# Altium PCB PCB_DriveSwitch_rev1_05062018.PcbDoc
Units mm, origin at the board's own origin, x right, y up, seen from the top; angles counter-clockwise.
Board outline 72.5 x 80 mm, 2 copper layers (Top Layer, Bottom Layer), stack 1.671 mm thick; 35 components, 28 nets, 103 pads, 12 vias.
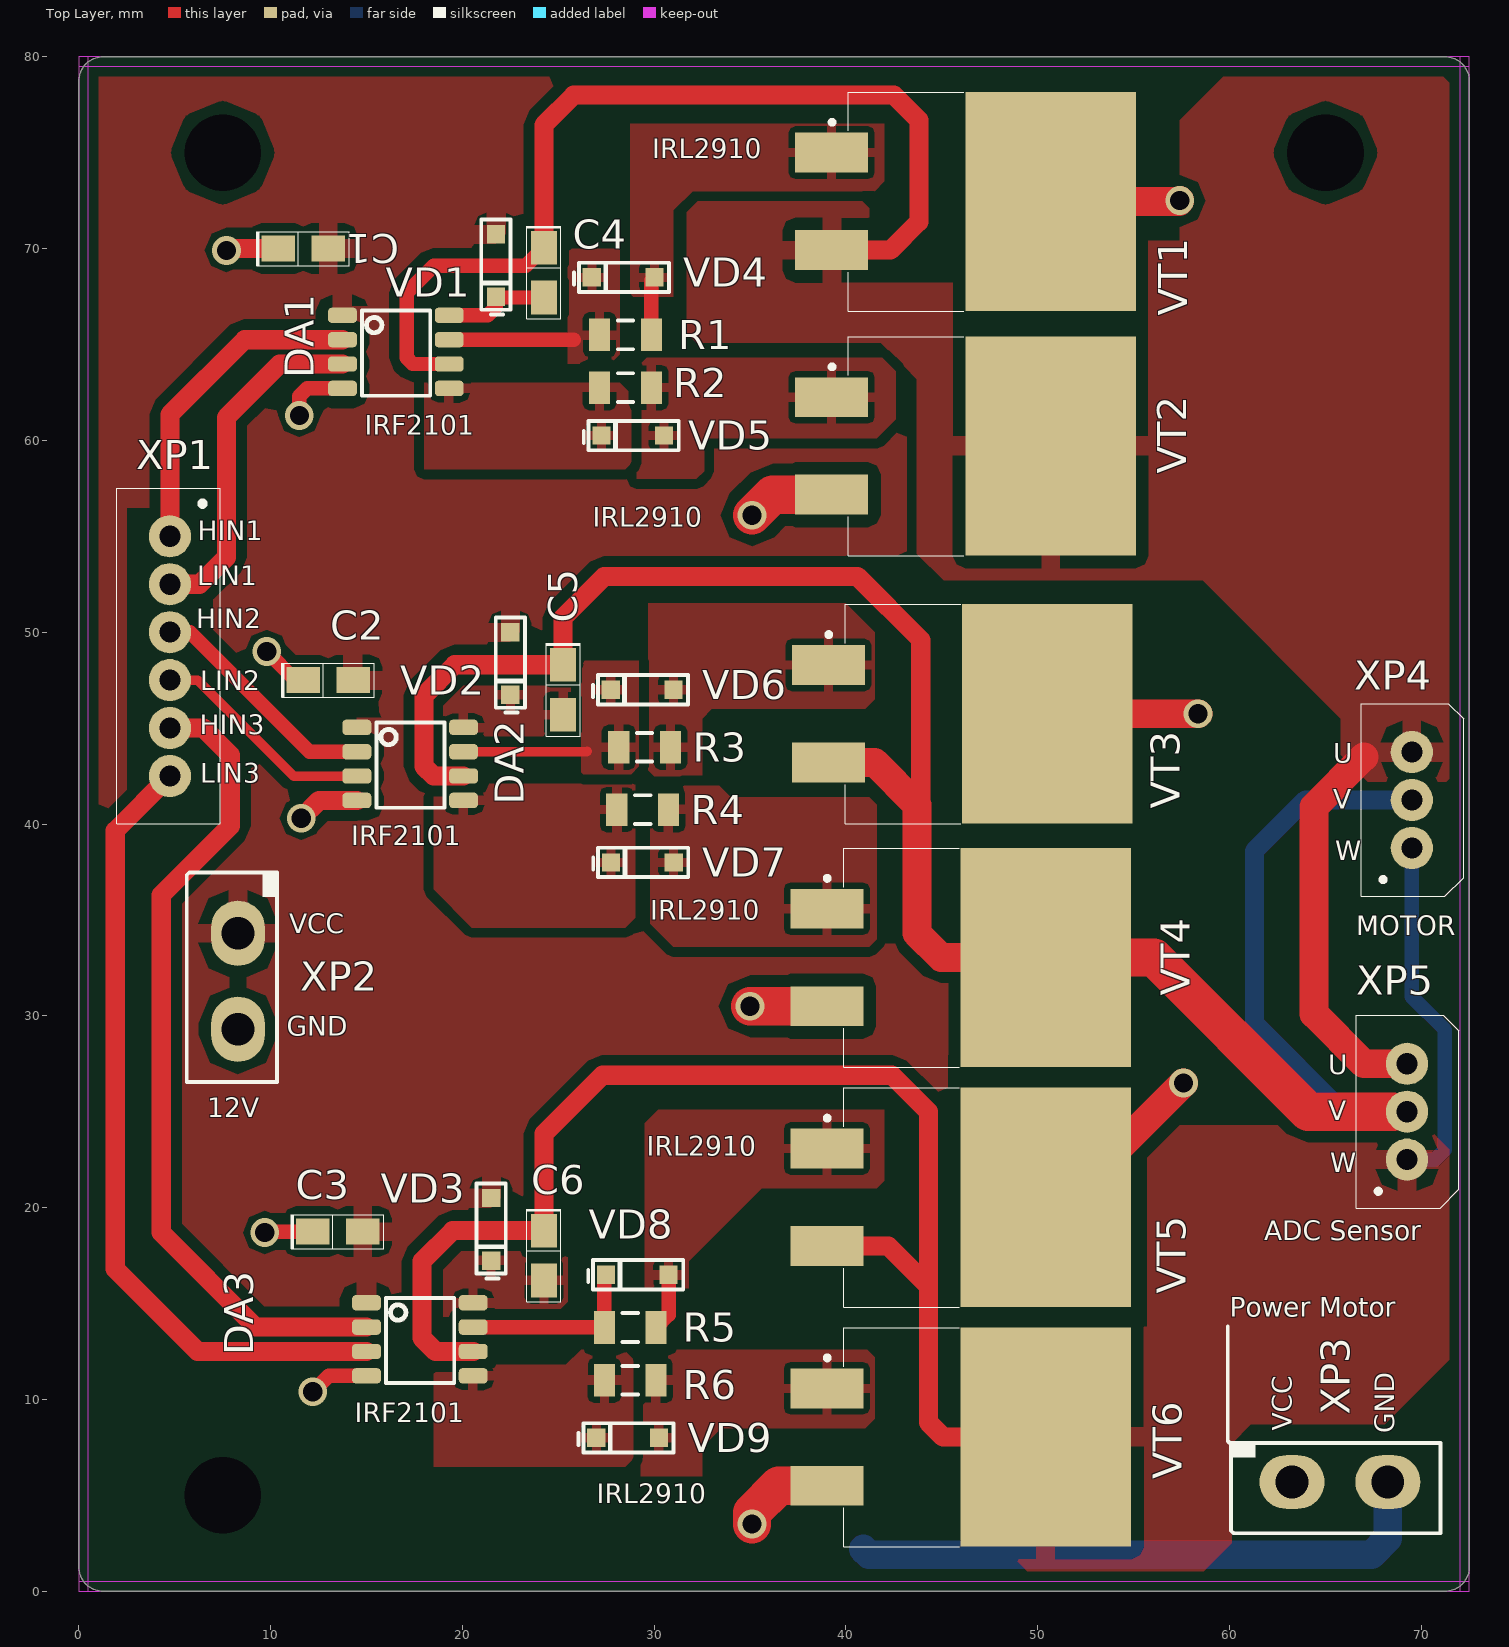
[diagram p0: Top Layer view]
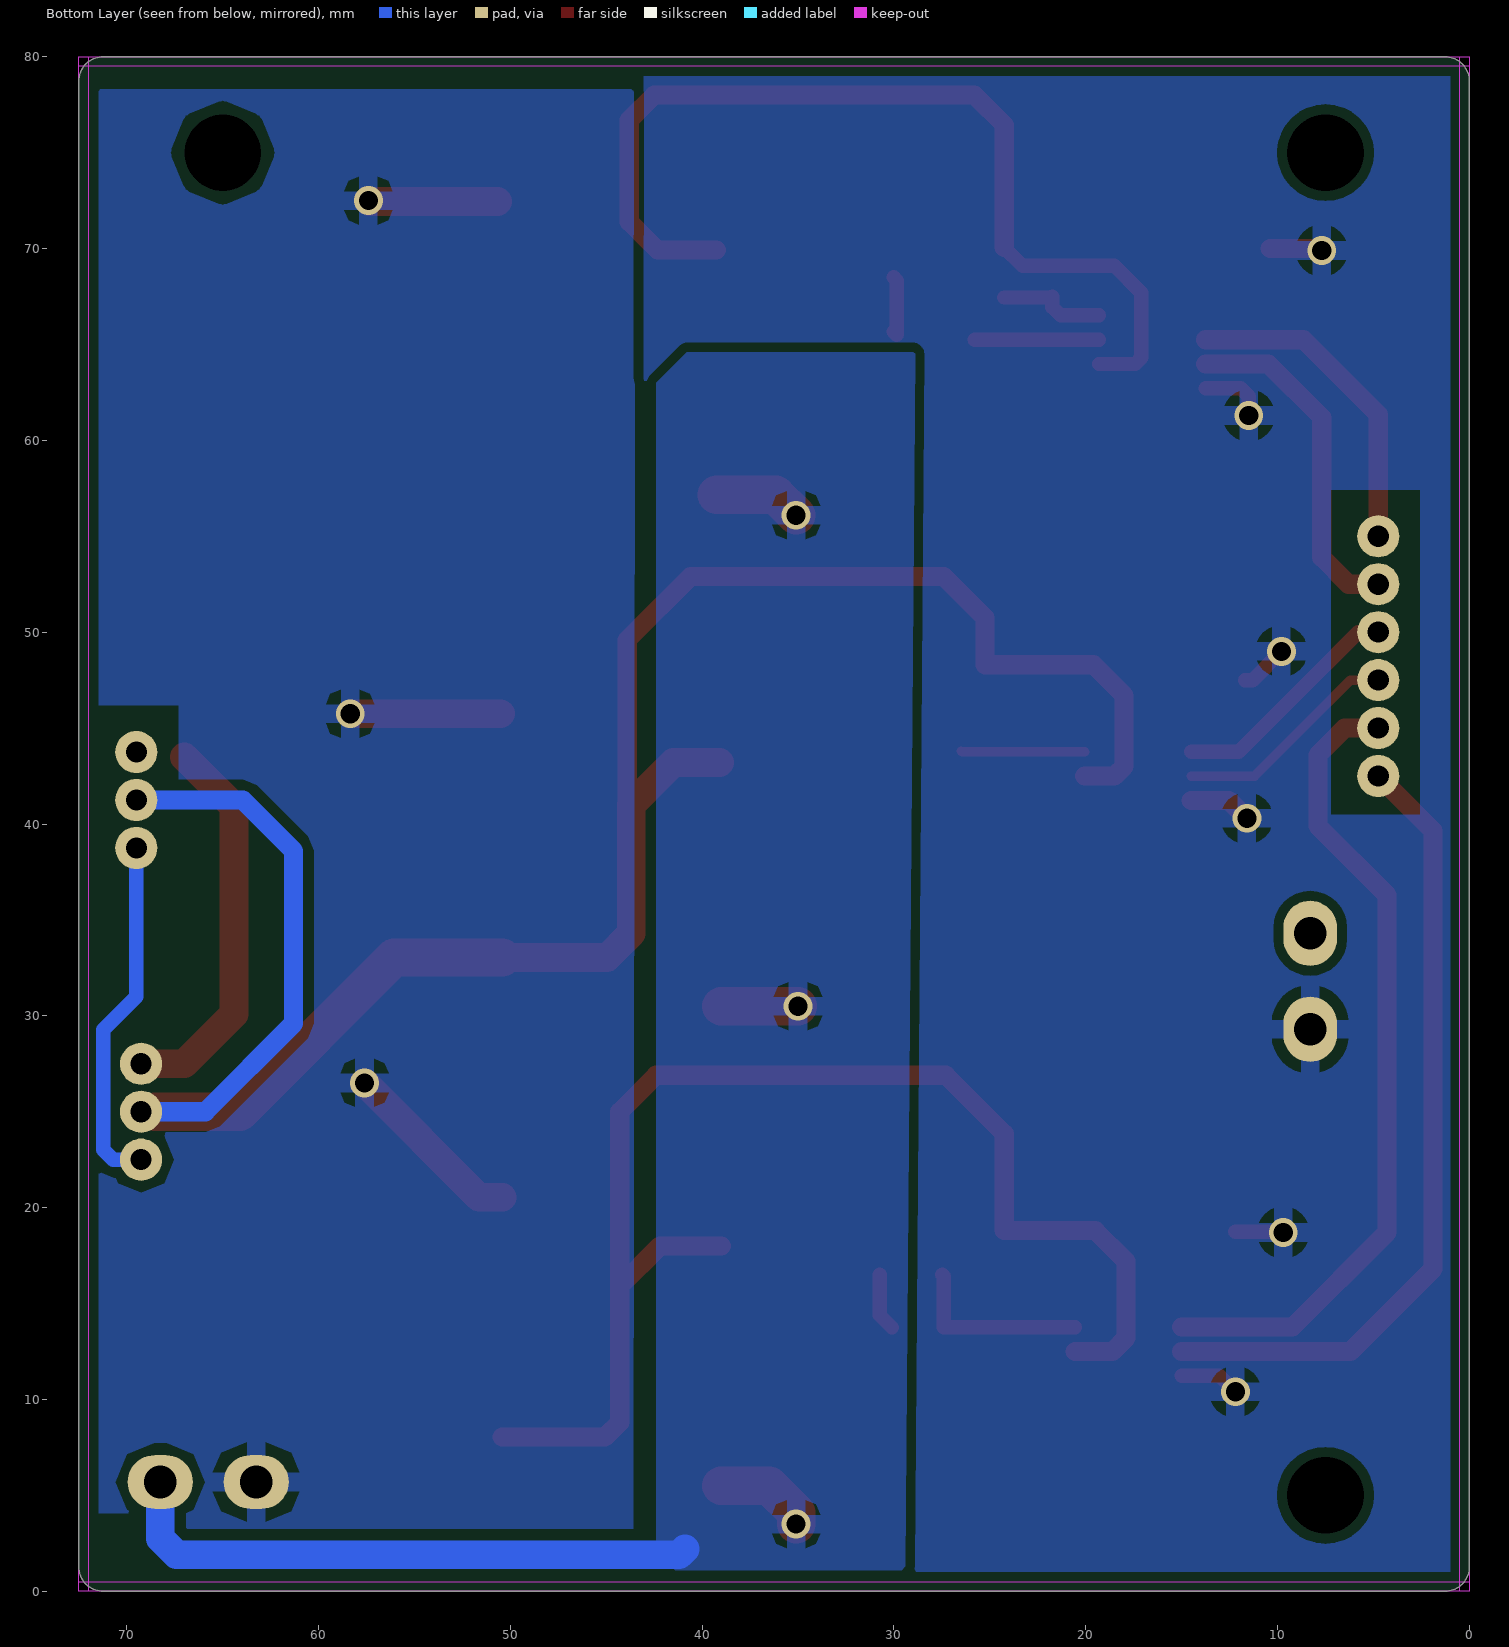
[diagram p1: Bottom Layer view, seen from below]
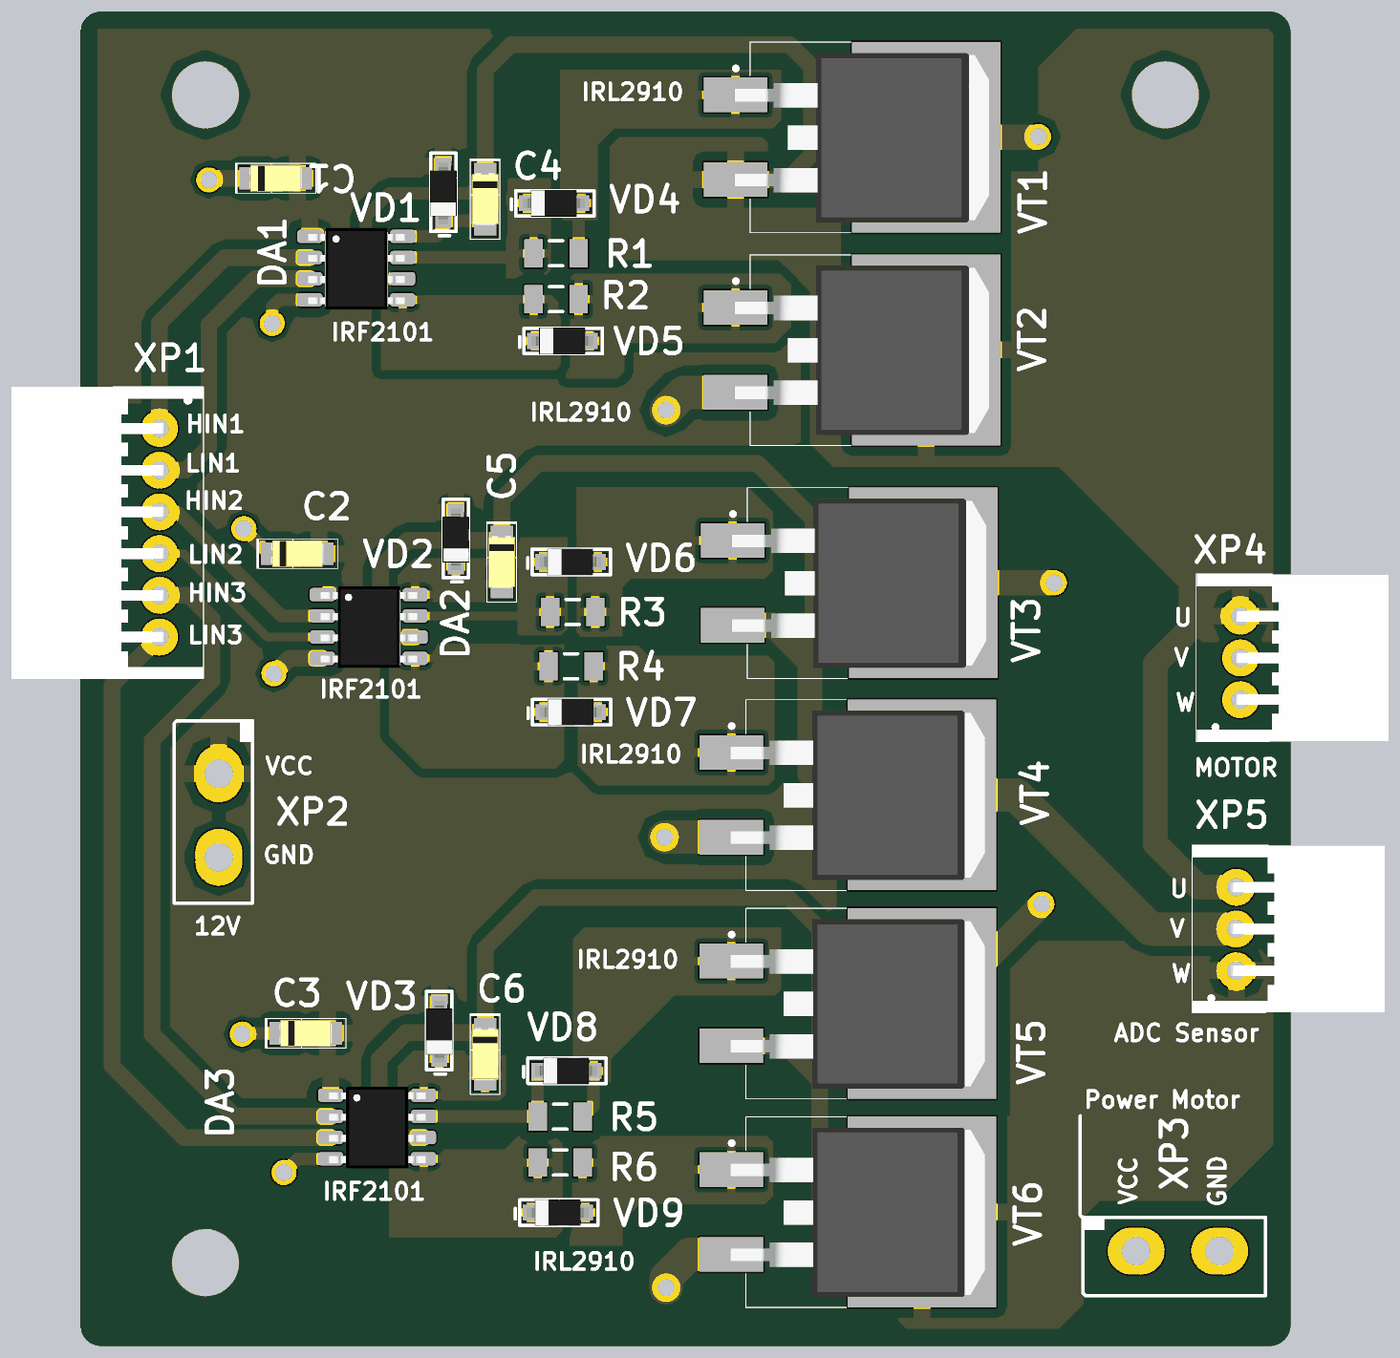
[diagram p2: 3D render of the assembled board from above, using the file's embedded part models]

## Layer stack, top to bottom
Top Solder: solder mask 0.0102, Solder Resist, Dk 3.5
Top Layer: signal copper 0.0356
Dielectric 1: dielectric 1.6, FR-4, Dk 4.8
Bottom Layer: signal copper 0.0356
Bottom Solder: solder mask 0.0102, Solder Resist, Dk 3.5

## Board outline
1.27,0 cw(c1.27,1.27) 0,1.27 0,78.73 cw(c1.27,78.73) 1.27,80 71.23,80 cw(c71.23,78.73) 72.5,78.73 72.5,1.27 cw(c71.23,1.27) 71.23,0

## Design rules (kind name [scope] priority, off if disabled: settings)
Clearance [All] p1: gap=0.5 ignorepadtopadclearanceinfootprint=FALSE except(0.125: Arc-Arc Arc-Track Arc-Via Track-Track Track-Via SMDPad-SMDPad SMDPad-Via THPad-Via Via-Via; 0.254: Arc-Fill Track-Fill SMDPad-Fill THPad-Fill Via-Fill Fill-Fill; 0.3: Arc-SMDPad Track-SMDPad THPad-THPad Via-Poly; 0.6: SMDPad-Poly)
PlaneClearance PlaneClearance_Sig [InPadClass('Signal')] p1: clearance=0.5
PlaneClearance PlaneClearance_pow [InPadClass('Power')] p2: clearance=1
PlaneConnect PlaneConnect_Signal [InPadClass('Signal')] p1: planeconnectstyle=Relief reliefexpansion=0.5 reliefentries=4 reliefconductorwidth=0.5 reliefairgap=0.3
PlaneConnect PlaneConnect_Pow [InPadClass('Power')] p2: planeconnectstyle=Relief reliefexpansion=0.5 reliefentries=4 reliefconductorwidth=0.75 reliefairgap=0.3
PolygonConnect PolygonConnect_Pow [(InNetClass('OUTPUTSignalPhase') OR InNetClass('PowerControl') OR InNetClass('PowerOut'))] p1: connectstyle=Relief reliefconductorwidth=1 reliefentries=4 polygonreliefangle="90 Angle" airgapwidth=0.6
PolygonConnect PolygonConnect_Sign [(InNetClass('C_controlGate') OR InNetClass('c_strapp')OR InNetClass('SignalInput'))] p2: connectstyle=Relief reliefconductorwidth=0.5 reliefentries=4 polygonreliefangle="90 Angle" airgapwidth=0.3
RoutingVias RoutingVias_1 [(InNetClass('OUTPUTSignalPhase') OR InNetClass('PowerControl') OR InNetClass('PowerOut'))] p1: holewidth=1 width=1.5 viastyle="Through Hole" minholewidth=1 minwidth=1.5 maxholewidth=1 maxwidth=1.5
RoutingVias RoutingVias1 [(InNetClass('C_controlGate') OR InNetClass('c_strapp')OR InNetClass('SignalInput'))] p2: holewidth=0.6 width=1.2 viastyle="Through Hole" minholewidth=0.6 minwidth=1.2 maxholewidth=0.6 maxwidth=1.2
SolderMaskExpansion [All] p1: expansion=0.102
Width Input_S [InNetClass('SignalInput')] p1: maxlimit=1 minlimit=0.4 preferedwidth=0.5
Width POWEROUT [InNetClass('PowerOut')] p2: maxlimit=3 minlimit=0.75 preferedwidth=1
Width Power_circuit [InNetClass('PowerControl')] p3: maxlimit=3 minlimit=0.75 preferedwidth=2
Width OUT [InNetClass('OUTPUTSignalPhase')] p4: maxlimit=3 minlimit=0.75 preferedwidth=2
Width stpp [InNetClass('c_strapp')] p5: maxlimit=1 minlimit=0.5 preferedwidth=0.7
Width GAIN_circ [InNetClass('C_controlGate')] p6: maxlimit=1 minlimit=0.5 preferedwidth=0.7
28 further rules are at their usual default settings.

## Classes and differential pairs
pad class Signal: DA1-2 DA1-3 DA2-2 DA2-3 DA3-2 DA3-3 R1-1 R1-2 R2-1 R2-2 R3-1 R3-2 R4-1 R4-2 R5-1 R5-2 R6-1 R6-2 VD4-1 VD4-2 VD5-1 VD5-2 VD6-1 VD6-2 VD7-1 VD7-2 VD8-1 VD8-2 VD9-1 VD9-2 VT1-1 VT2-1 VT3-1 VT4-1 VT5-1 VT6-1
pad class Power: C1-1 C1-2 C2-1 C2-2 C3-1 C3-2 C4-1 C4-2 C5-1 C5-2 C6-1 C6-2 DA1-1 DA1-4 DA1-5 DA1-6 DA1-7 DA1-8 DA2-1 DA2-4 DA2-5 DA2-6 DA2-7 DA2-8 DA3-1 DA3-4 DA3-5 DA3-6 DA3-7 DA3-8 VD1-1 VD1-2 VD2-1 VD2-2 VD3-1 VD3-2 VT1-2 VT1-3 VT2-2 VT2-3 VT3-2 VT3-3 VT4-2 VT4-3 VT5-2 VT5-3 VT6-2 VT6-3 XP2-1 XP2-2 XP3-1 XP3-2 XP4-1 XP4-2 XP4-3 XP5-1 XP5-2 XP5-3
net class C_controlGate: NetDA1_5 NetDA1_7 NetDA2_5 NetDA2_7 NetDA3_5 NetDA3_7 NetR1_2 NetR2_2 NetR3_2 NetR4_2 NetR5_2 NetR6_2
net class c_strapp: NetC4_1 NetC5_1 NetC6_1
net class OUTPUTSignalPhase: U V W
net class PowerControl: +12V GND
net class PowerOut: +VDD_M GND_M
net class SignalInput: HIN1 HIN2 HIN3 LIN1 LIN2 LIN3

## Components (designator, comment, footprint, x,y, rotation, side; value= is the part's Value field where it differs from the comment)
C1 "10uF" CAPTtantaltypeA 11.7,70 r180 top
C2 "10uF" CAPTtantaltypeA 13,47.5 r180 top
C3 "10uF" CAPTtantaltypeA 13.5,18.75 r180 top
C4 "2.2uF" CAPTtantaltypeA 24.25,68.75 r90 top
C5 "2.2uF" CAPTtantaltypeA 25.25,47 r90 top
C6 "2.2uF" CAPTtantaltypeA 24.25,17.5 r90 top
DA1 "IR2101" SO-8 14.512,66.52 r0 top
DA2 "IR2101" SO-8 15.262,45.04 r0 top
DA3 "IR2101" SO-8 15.762,15.04 r0 top
R1 "10 Ом" 1206 28.5,65.5 r0 top
R2 "10 Ом" 1206 28.5,62.75 r0 top
R3 "10 Ом" 1206 29.5,44 r0 top
R4 "10 Ом" 1206 29.4,40.75 r0 top
R5 "10 Ом" 1206 28.75,13.75 r0 top
R6 "10 Ом" 1206 28.75,11 r0 top
VD1 "SS0540" SOD-123 21.75,70.75 r270 top
VD2 "SS0540" SOD-123 22.5,50 r270 top
VD3 "SS0540" SOD-123 21.5,20.5 r270 top
VD4 "SS0540" SOD-123 30.016,68.5 r180 top
VD5 "SS0540" SOD-123 30.516,60.25 r180 top
VD6 "SS0540" SOD-123 31,47 r180 top
VD7 "SS0540" SOD-123 31.016,38 r180 top
VD8 "SS0540" SOD-123 30.75,16.5 r180 top
VD9 "SS0540" SOD-123 30.25,8 r180 top
VT1 "IRL2910SPBF" D2PACK 50.67,72.46 r270 top value="55А, 100В"
VT2 "IRL2910SPBF" D2PACK 50.67,59.71 r270 top value="55А, 100В"
VT3 "IRL2910SPBF" D2PACK 50.5,45.75 r270 top value="55А, 100В"
VT4 "IRL2910SPBF" D2PACK 50.42,33.04 r270 top value="55А, 100В"
VT5 "IRL2910SPBF" D2PACK 50.42,20.54 r270 top value="55А, 100В"
VT6 "IRL2910SPBF" D2PACK 50.42,8.04 r270 top value="55А, 100В"
XP1 "CWF-6R" CWF-6R 4.75,55 r270 top
XP2 "XY2500R-A-2P" KLS2-EDR-500-2P 8.3,34.3 r270 top
XP3 "XY2500R-A-2P" KLS2-EDR-500-2P 63.25,5.694 r0 top
XP4 "CWF-3R" CWF-3R 69.5,38.75 r90 top
XP5 "CWF-3R" CWF-3R 69.25,22.5 r90 top

## Footprints (in the part's own frame and the unit in brackets; to place one, negate y for a bottom-side part, rotate by r counter-clockwise, add the part's x,y. Pads: shape width x height; smd on the part's side, far side on the other; paste and mask are expansions set on the pad)
1206 [mm]
  rect 1.1x1.7 smd: 1(-1.35,0) 2(1.35,0)
  silkscreen extent -0.4,-0.75 0.4,0.75, body extent -1.55,-0.83 1.55,0.83, height 0.67
CAPTtantaltypeA [mm] "Molded Capacitor, 2-Leads, Body 3,20x1,60mm, IPC Medium Density"
  rect 1.75x1.35 smd: 1(-1.3,0) 2(1.3,0)
  silkscreen extent -2.41,-0.89 2.41,0.89, body extent -1.6,-0.8 1.6,0.8, height 1.61
CWF-3R [mm]
  round 2.2 hole 1.1: 1(5,0) 2(2.5,0) 3(0,0)
  silkscreen extent -2.52,-2.7 7.52,2.65, body extent -2.5,-8.88 7.5,2.62, height 5.75
CWF-6R [mm]
  round 2.2 hole 1.1: 1(0,0) 2(2.5,0) 3(5,0) 4(7.5,0) 5(10,0) 6(12.5,0)
  silkscreen extent -2.5,-2.78 14.97,2.63, body extent -2.5,-8.88 15,2.62, height 5.75
D2PACK [mm]
  rect 2.08x3.81 smd: 1(-2.54,-11.42) 3(2.54,-11.42)
  rect 11.43x8.89 smd: 2(0,0)
  silkscreen extent -5.7,-11.5 5.73,-4.52, body extent -5.05,-11.49 5.11,3.77, height 4.88
KLS2-EDR-500-2P [mm]
  oval 3.4x2.8 hole 1.7: 1(0,0) 2(5,0)
  silkscreen extent -3.18,-2.67 7.75,2.03, body extent -3,-20.69 7.49,1.64, height 18.12
SO-8 [mm]
  rrect50% 1.505x0.802 smd: 1(-0.762,0) 2(-0.762,-1.27) 3(-0.762,-2.54) 4(-0.762,-3.81) 5(4.8,-3.81) 6(4.8,-2.54) 7(4.8,-1.27) 8(4.8,0)
  silkscreen extent 0.25,-4.19 3.81,0.25, body extent -0.86,-4.39 4.92,0.51, height 1.45
SOD-123 [mm]
  rect 0.95x0.95 smd: 1(0,0) 2(3.266,0)
  silkscreen extent -0.76,-0.76 4.19,0.76, body extent -0.2,-0.8 3.5,0.8, height 1.27

## Part data
C1 C2 C3 C4 C5 C6: library part "Capasitor Electrolit", Manufacturer=Samsung, Package=typeA, Part Number=TA2u2, Power=16V, Price=0.105, ShoppingPlace=http://belchip.by/product/?selected_product=03141
DA1 DA2 DA3: Manufacture=Infineon, Package=SO-8, Part Number=IR2101SPBF, Price=1.27, Quantity=3, ShoppingPlace=http://belchip.by/product/?selected_product=06498
R1 R2 R3 R4 R5 R6: library part Resistor, Manufacturer=YAGEO, Package=1206, Part Number=RC1206JR-0710RL, Power=0.25W, Price=0.15, Quntity=6, ShoppingPlace=http://belchip.by/product/?selected_product=30320
VD1 VD2 VD3 VD4 VD5 VD6 VD7 VD8 VD9: Manufacturer="DC Components", Package=SOD-123, Part Number=SS0540, Price=0.17, Quantity=1, ShoppingPlace=http://belchip.by/product/?selected_product=15760
VT1 VT2 VT3 VT4 VT5 VT6: Manufacturer="International rectifier", Package=D2PАK, Part Number=IRL2910SPBF, Price=2.40, Quantity=6, ShoppingPlace=http://belchip.by/product/?selected_product=06731
XP1 XP4 XP5: Manufacturer=KLS, ShoppingPlace=http://belchip.by/product/?selected_product=32444
  XP1: Package=CWF-6R, Part Number=CWF-6R, Price=1, Quantity=1
  XP4 XP5: Package=CWF-3R, Part Number=CWF-3R, Price=0.05, Quantity=3
XP2 XP3: library part Connector_Power, Manufacturer=RoB, Package=XY2500R-A-2P, Part Number=XY2500R-A-2P, Price=0.1, Quantity=1, ShoppingPlace=http://belchip.by/product/?selected_product=14514

## Free pads (board coordinates)
  round 1.524 hole 4: -(7.5,5) -(7.5,75) -(65,75)

## Via types
v1: diameter 1.5, hole 1, Top Layer to Bottom Layer, 12 vias

## Nets (pads, with @x,y where several pads share a name; then routed paths per layer and width w, separated by ;. In a path a pad name is that pad's centre, name@x,y a point inside that pad or via, vN(x,y) a via of type N, cw(c..) or ccw(c..) an arc to the next point about the centre after c; other vN are vias at no path point)
+12V: C1.1 C2.1 C3.1 DA1.1 DA2.1 DA3.1 VD1.1 VD2.1 VD3.1 XP2.1
+VDD_M: VT1.2 VT3.2 VT5.2 XP3.1 | length 24.2
  Top Layer w1.5: VT5.2 51.64,20.54 v1(57.6,26.5) ; VT3.2 v1(58.35,45.75) ; VT1.2 57.36,72.46 v1(57.4,72.5)
GND: C1.2 C2.2 C3.2 DA1.4 DA2.4 DA3.4 XP2.2 | length 17.7
  Top Layer w0.75: v1(9.7,18.7) 9.75,18.75 C3.2 ; v1(9.8,49) 11.3,47.5 C2.2 ; v1(11.5,61.3) 11.5,62.3 11.91,62.71 DA1.4 ; v1(12.2,10.4) 13.03,11.23 DA3.4
  Top Layer w1: v1(7.7,69.9) 7.7,70 C1.2 ; v1(11.6,40.3) 12.53,41.23 DA2.4
GND_M: VT2.3 VT4.3 VT6.3 XP3.2 | length 44.4
  Top Layer w2: v1(35,30.5) VT4.3 ; v1(35.1,3.5) 35.1,4.1 36.5,5.5 VT6.3 ; v1(35.1,56.1) 36.17,57.17 VT2.3
  Bottom Layer w1.5: 40.9,2.2 41.2,1.9 67.4,1.9 68.25,2.75 XP3.2
HIN1: DA1.2 XP1.1 | length 17
  Top Layer w1: XP1.1 4.75,61.35 8.65,65.25 DA1.2
HIN2: DA2.2 XP1.3 | length 12.3
  Top Layer w0.75: XP1.3 5.8,50 12.03,43.77 DA2.2
HIN3: DA3.2 XP1.5 | length 42.9
  Top Layer w1: XP1.5 6.5,45 7.9,43.6 7.9,39.9 4.3,36.3 4.3,18.7 9.23,13.77 DA3.2
LIN1: DA1.3 XP1.2 | length 18
  Top Layer w1: XP1.2 6.3,52.5 7.7,53.9 7.7,61.2 10.48,63.98 DA1.3
LIN2: DA2.3 XP1.4 | length 11.8
  Top Layer w0.5: XP1.4 6.2,47.5 11.2,42.5 DA2.3
LIN3: DA3.3 XP1.6 | length 41.8
  Top Layer w1: XP1.6 1.9,39.65 1.9,16.8 6.2,12.5 DA3.3
NetC4_1: C4.1 DA1.8 VD1.2 | length 5.7
  Top Layer w0.75: DA1.8 21.32,66.52 21.75,66.95 VD1.2 21.784,67.45 C4.1
NetC5_1: C5.1 DA2.8 VD2.2
NetC6_1: C6.1 DA3.8 VD3.2
NetDA1_5: DA1.5 R2.1 VD5.2
NetDA1_7: DA1.7 R1.1 VD4.2 | length 6.5
  Top Layer w0.75: DA1.7 25.8,65.25
NetDA2_5: DA2.5 R4.1 VD7.2
NetDA2_7: DA2.7 R3.1 VD6.2 | length 6.5
  Top Layer w0.5: DA2.7 26.47,43.77 26.5,43.8
NetDA3_5: DA3.5 R6.1 VD9.2
NetDA3_7: DA3.7 R5.1 VD8.2 | length 9.6
  Top Layer w0.75: DA3.7 27.38,13.77 R5.1 27.4,16.416 VD8.2
NetR1_2: R1.2 VD4.1 VT1.1 | length 3.3
  Top Layer w0.75: R1.2@30.016,65.666 R1.2 29.85,68.334 VD4.1
NetR2_2: R2.2 VD5.1 VT2.1
NetR3_2: R3.2 VD6.1 VT3.1
NetR4_2: R4.2 VD7.1 VT4.1
NetR5_2: R5.2 VD8.1 VT5.1 | length 3
  Top Layer w0.75: R5.2 30.75,14.4 VD8.1
NetR6_2: R6.2 VD9.1 VT6.1
U: C4.2 DA1.6 VT1.3 VT2.2 XP4.1 XP5.1 | length 71.9
  Top Layer w0.75: DA1.6 17.42,63.98 17.1,64.3 17.1,67.7 18.5,69.1 23.3,69.1 C4.2
  Top Layer w1: C4.2 24.25,76.45 25.8,78 42.5,78 43.8,76.7 43.8,71.4 42.32,69.92 VT1.3
  Top Layer w1.5: 67,43.5 64.4,40.9 64.4,30.1 67,27.5 XP5.1
V: C5.2 DA2.6 VT3.3 VT4.2 XP4.2 XP5.2 | length 115
  Top Layer w1: DA2.6 18.5,42.5 18,43 18,46.7 19.6,48.3 C5.2 25.25,50.75 27.4,52.9 40.6,52.9 43.9,49.6 43.9,41.2 43.7,41
  Top Layer w1.5: VT3.3 41.49,43.21 43.7,41 43.7,34.3 44.96,33.04 VT4.2
  Top Layer w2: VT4.2 56.06,33.04 64.1,25 XP5.2@68.514,25
  Bottom Layer w1: XP5.2 65.9,25 61.3,29.6 61.3,38.6 63.95,41.25 XP4.2
W: C6.2 DA3.6 VT5.3 VT6.2 XP4.3 XP5.3 | length 88.6
  Top Layer w1: DA3.6 18.6,12.5 17.9,13.2 17.9,17.2 19.5,18.8 C6.2 24.25,23.85 27.3,26.9 42.4,26.9 44.3,25 44.3,15.9 ; VT5.3 42.2,18 44.3,15.9 ; VT6.2 45.06,8.04 44.3,8.8 44.3,15.9
  Bottom Layer w0.75: XP5.3 70.7,22.5 71.225,23.025 71.225,29.275 69.5,31 XP4.3

## Polygon pours and split planes (outlines as drawn)
NetDA2_5 on Top Layer "Top Overlay-No Net" (solid, remove dead copper, pour order 8): 18.5,41.5 18.5,36.6 20.5,34.6 28.5,34.6 29,35.1 29,42.1 19.1,42.1
NetC5_1 on Top Layer "Top Overlay-No Net" (solid, remove dead copper, pour order 6): 19,44.4 25.6,44.4 26.25,45.05 26.25,46.95 25.5,47.7 19.8,47.7 19,46.9
W on Top Layer "Top Overlay-No Net" (solid, remove dead copper, pour order 40): 48.9,13.8 48.9,1.6 50,0.5 58.1,0.5 60.1,2.5 60.1,7.7 61.1,8.7 68.1,8.7 71.8,12.4 71.8,22.7 70.2,24.3 57.4,24.3 55.7,22.6 55.7,13.8
NetR4_2 on Top Layer "Top Overlay-No Net" (solid, remove dead copper, pour order 10): 29.8,42 29.8,34.8 31,33.6 41.2,33.6 41.6,34 41.6,41 41.2,41.4 34,41.4 33.4,42
NetDA2_7 on Top Layer "Top Overlay-No Net" (solid, remove dead copper, pour order 4): 29.2,48.5 29.2,43 28.8,42.6 26.3,42.6 26.2,42.7 26.2,48.4 26.1,48.5
NetR3_2 on Top Layer "Top Overlay-No Net" (solid, remove dead copper, pour order 12): 32.5,42.5 32.5,45.5 33,46 41,46 41.5,46.5 41.5,50 40,51.5 29.7,51.5 29.7,42.8 30,42.5
NetDA1_5 on Top Layer "Top Overlay-No Net" (solid, remove dead copper, pour order 14): 18,63 28.2,63 28.8,62.4 28.8,58.8 28.5,58.5 18,58.5
NetDA1_7 on Top Layer "Top Overlay-No Net" (solid, remove dead copper, pour order 16): 28.2,70 28.2,64.5 27.7,64 25.5,64 25.5,69.8 25.7,70
NetR2_2 on Top Layer "Top Overlay-No Net" (solid, remove dead copper, pour order 20): 29.1,58 29.1,63.8 29.6,64.3 41.9,64.3 42.6,63.6 42.6,61.1 41.6,60.1 32.6,60.1 32.6,58.4 32.2,58
NetC6_1 on Top Layer "Top Overlay-No Net" (solid, remove dead copper, pour order 24): 19,14.3 24.7,14.3 25.5,15.1 25.5,17.7 25.1,18.1 19.7,18.1 19,17.4
NetDA3_5 on Top Layer "Top Overlay-No Net" (solid, remove dead copper, pour order 26): 18.5,11.8 25.4,11.8 26.2,12.6 28.4,12.6 28.9,12.1 28.9,6.9 28.5,6.5 18.5,6.5
NetR6_2 on Top Layer "Top Overlay-No Net" (solid, remove dead copper, pour order 28): 29.3,6 32.5,6 32.5,7.5 33.5,8.5 41,8.5 41.5,9 41.5,12.2 41.1,12.6 29.7,12.6 29.3,12.2
NetR5_2 on Top Layer "Top Overlay-No Net" (solid, remove dead copper, pour order 30): 42,25.1 42,21.4 41.6,21 35.6,21 31.8,17.2 31.8,15.8 29.5,15.8 29.5,24.4 30.2,25.1
NetR1_2 on Top Layer "Top Overlay-No Net" (solid, remove dead copper, pour order 22): 42,76.5 42,73.5 41.5,73 32,73 31,72 31,67.5 28.9,67.5 28.3,68.1 28.3,76.5
U on Top Layer "Top Overlay-No Net" (solid, remove dead copper, pour order 32): 41.2,70.4 41.2,72.1 40.7,72.6 32.4,72.6 31.7,71.9 31.7,65.6 32.2,65.1 41.8,65.1 43.7,63.2 43.7,54.1 45.1,52.7 56.4,52.7 57.4,53.7 57.4,70.1 57.4,70.4
U on Top Layer "Top Overlay-No Net" (solid, remove dead copper, pour order 36): 45.1,52.7 58.6,52.7 65.8,45.5 65.8,43.6 67.2,42.2 71.3,42.2 72,42.9 72,78.1 70.8,79.3 60,79.3 57.4,76.7 57.4,67.6 54.3,64.5 45.1,64.5
+12V on Top Layer "Top Layer-No Net" (solid, remove dead copper, pour order 47): 1.27,0 cw(c1.27,1.27) 0,1.27 0,78.73 cw(c1.27,78.73) 1.27,80 71.23,80 cw(c71.23,78.73) 72.5,78.73 72.5,1.27 cw(c71.23,1.27) 71.23,0
GND on Bottom Layer "Top Layer-No Net1" (solid, remove dead copper, pour order 48): 1.27,0 cw(c1.27,1.27) 0,1.27 0,78.73 cw(c1.27,78.73) 1.27,80 71.23,80 cw(c71.23,78.73) 72.5,78.73 72.5,1.27 cw(c71.23,1.27) 71.23,0
+VDD_M on Bottom Layer "Top Overlay-No Net" (solid, remove dead copper, pour order 42): 43.5,78.3 71.5,78.3 72.1,77.7 72.1,2.9 70.5,1.3 43.6,1.3
GND_M on Bottom Layer "Top Overlay-No Net" (solid, remove dead copper, pour order 44): 28.9,64.6 40.8,64.6 42.4,63 42.4,2.1 41.4,1.1 29.6,1.1 29.4,1.3

## Keep-outs
Keep-Out Layer:
  rectangle: 0,0 0.5,80
  rectangle: 0,0 72.5,0.5
  rectangle: 72,0 72.5,80
  rectangle: 0,79.5 72.5,80

## Other copper
Top Layer:
  pour cut-out: 2.5,56.5 7,56.5 7,41.6 2.5,41.6
  pour cut-out: 45.576,66.745 45.576,65.425 46.175,65.425 46.2,65.4 46.2,66.7
  pour cut-out: 55.764,66.745 55.764,65.425 55.125,65.425 55.1,65.4 55.1,66.7
  pour cut-out: 39.9,53.9 40,53.8 40.9,53.8 44.7,50 44.7,49.5 45.7,49.5 45.9,49.7 45.9,52.1 45.5,52.5 44.9,52.5 43.4,54 40,54
  pour cut-out: 45.326,27.982 45.3,27.957 45.3,25.9 45.8,25.9 45.8,28
  pour cut-out: 40.9,68.2 40.931,68.231 45.576,68.231 45.576,70.4 44.331,70.4 43.085,69.155 43.04,69.2 41.9,69.2 41.4,68.7
  pour cut-out: 28.741,67.659 28.741,76.509 28.575,76.675 28.2,76.675 27.85,76.325 27.85,70.5 27.925,70.5 28.425,70 28.4,69.975 28.4,67.675
Bottom Layer:
  pour cut-out: 43.039,78.293 43.039,79 71.7,79 71.7,78.3
  pour cut-out: 67.3,46.2 71.5,46.2 71.5,31.3 67.3,31.3
  pour cut-out: 2.6,57.4 2.6,40.5 7.2,40.5 7.2,57.4
  pour cut-out: 69.603,4.074 71.459,4.074 71.459,1.159 71.225,0.925 68.475,0.925

## Silkscreen, mask and mechanical layers (free items; w line width, h text height)
Top Overlay:
  lines w0.2: 59.9,13.8 59.9,7.901 ccw(c60.075,7.901) 60.075,7.726
  text "IRL2910" at 29.9,74.7 h1
  text "IRF2101" at 14.9,60.3 h1
  text "IRL2910" at 26.8,55.5 h1
  text "HIN1" at 6.2,54.8 h1
  text "LIN1" at 6.175,52.45 h1
  text "HIN2" at 6.125,50.2 h1
  text "LIN2" at 6.325,46.975 h1
  text "HIN3" at 6.3,44.675 h1
  text "U" at 65.4,43.2 h1
  text "LIN3" at 6.325,42.15 h1
  text "V" at 65.4,40.8 h1
  text "IRF2101" at 14.2,38.9 h1
  text "W" at 65.5,38.1 h1
  text "IRL2910" at 29.8,35 h1
  text "MOTOR" at 66.6,34.2 h1
  text "U" at 65.15,26.95 h1
  text "12V" at 6.7,24.7 h1
  text "V" at 65.15,24.55 h1
  text "IRL2910" at 29.6,22.7 h1
  text "W" at 65.25,21.85 h1
  text "ADC Sensor" at 61.8,18.3 h1
  text "Power Motor" at 60,14.3 h1
  text "IRF2101" at 14.4,8.8 h1
  text "IRL2910" at 27,4.6 h1
Board:
  lines w0.05: 0,1.27 ccw(c1.27,1.27) 1.27,0 2.5,0 10,0 70,0 71.23,0 ccw(c71.23,1.27) 72.5,1.27 72.5,2.5 72.5,77.5 72.5,78.73 ccw(c71.23,78.73) 71.23,80 70,80 5,80 1.27,80 ccw(c1.27,78.73) 0,78.73 0,75 0,2.5 0,1.27

## Text inside footprints (layer, text, board x,y; h text height)
XP2: Top Overlay "VCC" at 10.967,34.3 h1; Top Overlay "GND" at 10.84,28.966 h1
XP3: Top Overlay "VCC" at 63.25,8.361 h1 r90; Top Overlay "GND" at 68.584,8.234 h1 r90